# EAGLE board mach du phong da di day chua sua dien tro (EAGLE 5.10)

Size 149 x 84 mm. Coordinates in mm from the lower left corner, seen from the top.
Outline: 0,0 149,0 149,84 0,84 0,0
Copper layers (1*16): Top 0.035mm / dielectric 1.5mm / Bottom 0.035mm
Design rules "default *": minimum track width 11mil, minimum drill 30mil, track to track 13mil, track to pad 10mil, pad to pad 10mil, via to via 10mil, smd to smd 8mil, copper to edge 20mil, drill to drill 15mil, minimum pad ring 10mil, minimum via ring 8mil, stop-mask expansion 4mil, vias tented up to drill 0mil, thermal gap 10mil

## Footprints (pad centres in the part's own frame; a part is rotated, then mirrored left to right if it is on the bottom)
C5B3 = drill 0.813 pad 1.6 octagon: 1 -2.54,0; 2 2.54,0
E2-5 = drill 0.813 pad 1.27 round: + -1.016,0 | drill 0.813 pad 1.27 octagon: - 1.016,0
DO-1N4148 = drill 0.9 round: A -3.81,0; C 3.81,0
CR2032H = drill 1.118 pad 2.54 octagon: + 5.08,10.795; +@1 -5.08,10.795; - 0,-6.985
TO220H = drill 1.118 long: 1 -2.54,-10.16; 2 0,-10.16; 3 2.54,-10.16 | hole 3.302: 0,4.826
DIL40 = drill 0.813 long: 1 -24.13,-7.62; 2 -21.59,-7.62; 3 -19.05,-7.62; 4 -16.51,-7.62; 5 -13.97,-7.62; 6 -11.43,-7.62; 7 -8.89,-7.62; 8 -6.35,-7.62; 9 -3.81,-7.62; 10 -1.27,-7.62; 11 1.27,-7.62; 12 3.81,-7.62; 13 6.35,-7.62; 14 8.89,-7.62; 15 11.43,-7.62; 16 13.97,-7.62; 17 16.51,-7.62; 18 19.05,-7.62; 19 21.59,-7.62; 20 24.13,-7.62; 21 24.13,7.62; 22 21.59,7.62; 23 19.05,7.62; 24 16.51,7.62; 25 13.97,7.62; 26 11.43,7.62; 27 8.89,7.62; 28 6.35,7.62; 29 3.81,7.62; 30 1.27,7.62; 31 -1.27,7.62; 32 -3.81,7.62; 33 -6.35,7.62; 34 -8.89,7.62; 35 -11.43,7.62; 36 -13.97,7.62; 37 -16.51,7.62; 38 -19.05,7.62; 39 -21.59,7.62; 40 -24.13,7.62
DIL08 = drill 0.813 long: 1 -3.81,-3.81; 2 -1.27,-3.81; 3 1.27,-3.81; 4 3.81,-3.81; 5 3.81,3.81; 6 1.27,3.81; 7 -1.27,3.81; 8 -3.81,3.81
SPC4077 = drill 0.8 pad 2.184 long: 1 -3,0; 2 0,-4.8 | drill 1 pad 2.184 long: 3 3,0
0207/10 = drill 0.813 octagon: 1 -5.08,0; 2 5.08,0
LED5MM = drill 0.813 octagon: A -1.27,0; K 1.27,0
B3F-10XX = drill 1.016 long: 1 -3.251,2.261; 2 3.251,2.261; 3 -3.251,-2.261; 4 3.251,-2.261
BMT1205XH7.5 = drill 0.9 pad 1.5 round: + 3.8,0; - -3.8,0
7SEG13X19 = drill 0.8 square: P$1 11.5,-1.7; P$2 9,-1.7; P$3 6.5,-1.7; P$4 4,-1.7; P$5 1.5,-1.7; P$6 11.5,-17; P$7 9,-17; P$8 6.5,-17; P$9 4,-17; P$10 1.5,-17
XTAL12MHZ = drill 0.8 square: P$1 9.5,-2.5; P$2 0.5,-2.5
XTAL32KHZMINI = drill 0.8 square: P$1 0.5,-12; P$2 2.5,-12
PUSKLOCKBUTTON = drill 0.8 square: P$1 5.04,0; P$2 3.04,0; P$3 1.04,0; P$4 1.04,-5; P$5 3.04,-5; P$6 5.04,-5
C9014 = drill 0.8 square: P$1 0.23,1; P$2 2.25,1; P$3 4.27,1
DIL16 = drill 0.813 long: 1 -8.89,-3.81; 2 -6.35,-3.81; 3 -3.81,-3.81; 4 -1.27,-3.81; 5 1.27,-3.81; 6 3.81,-3.81; 7 6.35,-3.81; 8 8.89,-3.81; 9 8.89,3.81; 10 6.35,3.81; 11 3.81,3.81; 12 1.27,3.81; 13 -1.27,3.81; 14 -3.81,3.81; 15 -6.35,3.81; 16 -8.89,3.81

## Placement (x,y rotation side)
C1  [C5B3]  27.56,65.79 90 top
C2  [C5B3]  23.94,66.03 270 top
C3  [E2-5]  34.11,6.59 270 top
D1  [DO-1N4148]  20.14,65.28 90 top
D2  [DO-1N4148]  27.26,27.86 90 top
D3  [DO-1N4148]  24.46,54.73 270 top
D5  [DO-1N4148]  20.92,17.02 0 top
G1  CR2032H  [CR2032H]  47.3,68 180 top
IC1  7805T  [TO220H]  133.66,73.55 90 top
IC2  AT89C51-12PC  [DIL40]  23.78,45.67 90 top
IC4  ds1307  [DIL08]  24.15,42.83 0 top
J1  [SPC4077]  138.06,4.52 180 top
L1  [0207/10]  27.46,55.35 270 top
L2  [0207/10]  21.66,54.95 270 top
L3  [0207/10]  37.36,46.75 270 top
L4  [0207/10]  61.42,22.53 90 top
L5  [0207/10]  58.59,22.45 90 top
L6  [0207/10]  55.51,22.37 90 top
L7  [0207/10]  52.68,22.53 90 top
L8  [0207/10]  40.38,22.71 90 top
L9  [0207/10]  49.59,22.47 90 top
L10  [0207/10]  46.65,22.55 90 top
L11  [0207/10]  43.49,22.6 90 top
L12  [0207/10]  87.72,22.6 90 top
L13  [0207/10]  84.79,22.54 90 top
L14  [0207/10]  81.61,22.59 90 top
L15  [0207/10]  78.64,22.52 90 top
L16  [0207/10]  91,23.1 90 top
L17  [0207/10]  75.65,22.77 90 top
L18  [0207/10]  72.32,22.62 90 top
L19  [0207/10]  69.3,22.52 90 top
L20  [0207/10]  66.72,61.15 270 top
L21  [0207/10]  70.82,61.05 270 top
L22  [0207/10]  74.38,61.25 270 bottom
L23  [0207/10]  77.12,60.95 270 top
L24  [0207/10]  59.13,60.68 270 top
L25  [0207/10]  80.1,61.45 270 top
L26  [0207/10]  84.56,61.74 270 top
L27  [0207/10]  89,72.53 270 top
L28  [0207/10]  101.8,61.25 270 top
L29  [0207/10]  105.2,61.25 270 top
L30  [0207/10]  108.6,61.15 270 top
L31  [0207/10]  112.1,61.15 270 bottom
L32  [0207/10]  98.91,72.46 270 top
L33  [0207/10]  115.48,61.25 270 top
L34  [0207/10]  118.78,60.95 270 top
L35  [0207/10]  121.98,60.95 270 top
L36  [0207/10]  93.84,72.62 270 top
L37  [0207/10]  62.58,60.85 270 top
L38  [0207/10]  62.62,73.65 90 top
L39  [0207/10]  100.31,13.21 0 top
L40  [0207/10]  12.88,17.65 270 top
L41  [0207/10]  8.36,17.85 270 top
L42  [0207/10]  100.68,30.55 0 top
L43  [0207/10]  100.48,24.96 0 top
L44  [0207/10]  100.25,19.15 0 top
L45  [0207/10]  100.31,10.48 180 top
L46  [0207/10]  100.52,27.87 180 top
L47  [0207/10]  100.37,22.27 180 top
L48  [0207/10]  100.46,16.12 0 top
L49  [0207/10]  29.06,11.25 90 top
L50  [0207/10]  24.85,79.84 0 top
L51  [0207/10]  12.34,30.95 270 top
L52  [0207/10]  19.94,28.25 270 top
L53  [0207/10]  100.38,7.61 180 top
LED1  [LED5MM]  124.21,9.35 180 top
LED5  [LED5MM]  78.89,38.83 270 top
LED6  [LED5MM]  78.78,48.19 270 top
LED7  [LED5MM]  120.48,44.19 180 top
LED8  [LED5MM]  135.37,42.97 270 top
LED9  [LED5MM]  127.06,30.83 270 top
LED10  [LED5MM]  127.1,18.05 270 top
S1  [B3F-10XX]  8.09,70.42 90 bottom
S2  [B3F-10XX]  7.69,55.19 90 bottom
S3  [B3F-10XX]  7.49,40.66 90 bottom
S5  [B3F-10XX]  128.83,61.4 90 bottom
SG1  BMT1205XH7.5  [BMT1205XH7.5]  21.05,10.22 0 top
U$1  7SEG13X19  [7SEG13X19]  61.2,53.52 0 top
U$2  7SEG13X19  [7SEG13X19]  84.16,53.62 0 top
U$3  7SEG13X19  [7SEG13X19]  100.02,53.62 0 top
U$4  7SEG13X19  [7SEG13X19]  45.48,53.52 0 top
U$5  XTAL12MHZ  [XTAL12MHZ]  19.4,78.25 0 top
U$6  XTAL32KHZMINI  [XTAL32KHZMINI]  22.29,23.57 180 bottom
U$7  PUSHLOCKBUTON  [PUSKLOCKBUTTON]  139.75,64.63 270 bottom
U$8  C9014  [C9014]  13.7,5.7 90 top
U$9  C9014  [C9014]  109.41,29.05 0 top
U$10  C9014  [C9014]  109.09,11.43 0 top
U$11  C9014  [C9014]  109.48,22.66 0 top
U$12  C9014  [C9014]  109.3,17.08 0 top
U$13  C9014  [C9014]  94.97,60.03 90 top
V1  74595N  [DIL16]  76.71,9.91 180 top
V2  74595N  [DIL16]  75.71,73.73 0 top
V3  74595N  [DIL16]  50.29,10.33 180 top
V4  74595N  [DIL16]  113.39,73.53 0 top

## Library data of the parts
C1 C2 = capacitor-wima
C3 = rcl
D1-D3 D5 = microbuilder
G1 = battery
IC1 = linear
IC2 = atmel
IC4 = ic-package
J1 = con-jack
L1-L53 = resistor
LED1 LED5-LED10 = led
S1-S3 S5 = switch-omron
SG1 = buzzer
U$1-U$4 = 7seg13x19
U$5 = xtal12mhz
U$6 = Xtal32khzmini
U$7 = pushlockbutton
U$8-U$13 = C9014
V1-V4 = 74ttl-din

## Nets
N$1: IC2.11 IC4.5 L1.2
N$2: IC2.10 IC4.6 L2.2
N$3: IC4.1 U$6.P$1
N$4: C3.+ IC2.9 L3.2
N$5: G1.+ IC4.3
N$6: IC4.2 U$6.P$2
N$7: C2.2 IC2.19 U$5.P$1
N$8: C1.1 IC2.18 U$5.P$2
N$9: D1.C IC2.39 L50.1 S1.1
N$10: IC2.25 L38.2
N$11: IC2.1 V3.11
N$12: IC2.2 V3.14
N$13: IC2.3 V1.11
N$14: IC2.4 L39.1 L42.1 L43.1 L44.1 V1.14
N$15: IC2.5 V2.11
N$16: L9.2 U$4.P$4
N$17: IC2.6 V2.14
N$18: IC2.7 V4.11
N$19: IC2.8 V4.14
N$20: L4.1 V3.1
N$21: L8.1 V3.15
N$22: L7.2 U$4.P$10
N$23: L9.1 V3.5
N$24: L10.1 V3.6
N$25: L4.2 U$4.P$1
N$26: L11.1 V3.7
N$27: L6.1 V3.3
N$28: L7.1 V3.4
N$29: L5.1 V3.2
N$32: L10.2 U$4.P$5
N$34: L11.2 U$4.P$6
N$35: L37.1 L38.1
N$36: L15.2 U$1.P$10
N$37: L13.1 V1.2
N$38: L14.1 V1.3
N$39: L15.1 V1.4
N$41: L17.1 V1.5
N$42: L18.2 U$1.P$5
N$43: L18.1 V1.6
N$44: L16.1 V1.15
N$45: L16.2 U$1.P$2
N$47: L13.2 U$1.P$7
N$48: L14.2 U$1.P$9
N$51: L19.2 U$1.P$6
N$52: J1.1 S5.1 U$7.P$3
N$53: L37.2 U$13.P$2
N$54: L23.2 U$2.P$10
N$55: L27.1 V2.7
N$56: L25.1 V2.5
N$57: L26.1 V2.6
N$58: L27.2 U$2.P$6
N$59: L23.1 V2.4
N$60: L21.1 V2.2
N$61: L20.1 V2.1
N$62: L24.1 V2.15
N$63: L24.2 U$2.P$2
N$64: L20.2 U$2.P$1
N$65: L21.2 U$2.P$7
N$66: L22.2 U$2.P$9
N$67: L25.2 U$2.P$4
N$68: L26.2 U$2.P$5
N$69: L22.1 V2.3
N$70: L31.2 U$3.P$10
N$71: L35.1 V4.7
N$72: L33.1 V4.5
N$73: L34.1 V4.6
N$74: L30.1 V4.3
N$75: L31.1 V4.4
N$76: L29.1 V4.2
N$77: L28.1 V4.1
N$78: L32.1 V4.15
N$79: L32.2 U$3.P$2
N$80: L28.2 U$3.P$1
N$81: L29.2 U$3.P$7
N$82: L30.2 U$3.P$9
N$83: L33.2 U$3.P$4
N$84: L34.2 U$3.P$5
N$85: L35.2 U$3.P$6
N$86: L36.2 U$13.P$3
N$87: LED6.A U$13.P$1
N$88: LED5.A LED6.K
N$89: IC2.26 L40.1
N$90: L40.2 U$8.P$2
N$91: L45.1 U$10.P$2
N$92: L46.1 U$9.P$2
N$93: L47.1 U$11.P$2
N$94: LED7.K U$10.P$3
N$95: D5.A SG1.- U$8.P$3
N$96: D3.C IC2.37 L52.1 S3.1
N$97: L48.2 U$12.P$2
N$98: LED10.K U$12.P$3
N$99: LED9.K U$11.P$3
N$100: L43.2 U$11.P$1
N$101: LED8.K U$9.P$3
N$102: L42.2 U$9.P$1
N$103: L41.2 U$8.P$1
N$104: L44.2 U$12.P$1
N$105: IC2.13 L45.2
N$106: D1.A D2.A D3.A IC2.12 L49.2
N$107: IC2.14 L46.2
N$108: IC2.15 L47.2
N$109: IC2.16 L48.1
N$110: IC2.21 V3.12
N$111: IC2.22 V1.12
N$112: IC2.23 V2.12
N$113: IC2.24 V4.12
N$114: C1.2 C2.1 G1.- IC1.2 IC2.20 IC4.4 L3.1 L41.1 L53.2 LED1.K LED5.K S1.3 S2.3 S3.3 U$1.P$8 U$2.P$8 U$3.P$8 U$4.P$8 V1.8 V1.13 V2.8 V2.13 V3.8 V3.13 V4.8 V4.13
N$115: J1.3 L53.1
N$116: C3.- D5.C IC1.3 IC2.31 IC2.40 IC4.8 L1.1 L2.1 L36.1 L49.1 L50.2 L51.2 L52.2 LED7.A LED8.A LED9.A LED10.A SG1.+ V1.10 V1.16 V2.10 V2.16 V3.10 V3.16 V4.10 V4.16
N$117: D2.C IC2.38 L51.1 S2.1
N$118: J1.2 LED1.A
N$119: IC1.1 S5.3 U$7.P$2
N$120: L8.2 U$4.P$2
N$121: L6.2 U$4.P$9
N$122: L39.2 U$10.P$1
N$123: L17.2 U$1.P$4
N$124: L5.2 U$4.P$7
N$127: L19.1 V1.7
N$128: L12.1 V1.1
N$129: L12.2 U$1.P$1

## Tracks (layer width: path | path; a pad name or v marks a point on that pad's centre or on a via)
N$1  (2 unrouted)
N$2  (2 unrouted)
N$3  (1 unrouted)
N$4  (2 unrouted)
N$5  (1 unrouted)
N$6  (1 unrouted)
N$7  (2 unrouted)
N$8  (2 unrouted)
N$9  (3 unrouted)
N$10  (1 unrouted)
N$11  (1 unrouted)
N$12  (1 unrouted)
N$13  (1 unrouted)
N$14  (5 unrouted)
N$15  (1 unrouted)
N$16  (1 unrouted)
N$17  (1 unrouted)
N$18  (1 unrouted)
N$19  (1 unrouted)
N$20  (1 unrouted)
N$21  (1 unrouted)
N$22  (1 unrouted)
N$23  (1 unrouted)
N$24  (1 unrouted)
N$25  (1 unrouted)
N$26  (1 unrouted)
N$27  (1 unrouted)
N$28  (1 unrouted)
N$29  (1 unrouted)
N$32  (1 unrouted)
N$34  (1 unrouted)
N$35  (1 unrouted)
N$36  (1 unrouted)
N$37  (1 unrouted)
N$38  (1 unrouted)
N$39  (1 unrouted)
N$41  (1 unrouted)
N$42  (1 unrouted)
N$43  (1 unrouted)
N$44  (1 unrouted)
N$45  (1 unrouted)
N$47  (1 unrouted)
N$48  (1 unrouted)
N$51  (1 unrouted)
N$52  (2 unrouted)
N$53  (1 unrouted)
N$54  (1 unrouted)
N$55  (1 unrouted)
N$56  (1 unrouted)
N$57  (1 unrouted)
N$58  (1 unrouted)
N$59  (1 unrouted)
N$60  (1 unrouted)
N$61  (1 unrouted)
N$62  (1 unrouted)
N$63  (1 unrouted)
N$64  (1 unrouted)
N$65  (1 unrouted)
N$66  (1 unrouted)
N$67  (1 unrouted)
N$68  (1 unrouted)
N$69  (1 unrouted)
N$70  (1 unrouted)
N$71  (1 unrouted)
N$72  (1 unrouted)
N$73  (1 unrouted)
N$74  (1 unrouted)
N$75  (1 unrouted)
N$76  (1 unrouted)
N$77  (1 unrouted)
N$78  (1 unrouted)
N$79  (1 unrouted)
N$80  (1 unrouted)
N$81  (1 unrouted)
N$82  (1 unrouted)
N$83  (1 unrouted)
N$84  (1 unrouted)
N$85  (1 unrouted)
N$86  (1 unrouted)
N$87  (1 unrouted)
N$88  (1 unrouted)
N$89  (1 unrouted)
N$90  (1 unrouted)
N$91  (1 unrouted)
N$92  (1 unrouted)
N$93  (1 unrouted)
N$94  (1 unrouted)
N$95  (2 unrouted)
N$96  (3 unrouted)
N$97  (1 unrouted)
N$98  (1 unrouted)
N$99  (1 unrouted)
N$100  (1 unrouted)
N$101  (1 unrouted)
N$102  (1 unrouted)
N$103  (1 unrouted)
N$104  (1 unrouted)
N$105  (1 unrouted)
N$106  (4 unrouted)
N$107  (1 unrouted)
N$108  (1 unrouted)
N$109  (1 unrouted)
N$110  (1 unrouted)
N$111  (1 unrouted)
N$112  (1 unrouted)
N$113  (1 unrouted)
N$114  (25 unrouted)
N$115  (1 unrouted)
N$116  (25 unrouted)
N$117  (3 unrouted)
N$118  (1 unrouted)
N$119  (2 unrouted)
N$120  (1 unrouted)
N$121  (1 unrouted)
N$122  (1 unrouted)
N$123  (1 unrouted)
N$124  (1 unrouted)
N$127  (1 unrouted)
N$128  (1 unrouted)
N$129  (1 unrouted)